# Altium PCB USB_Oscilloscope.PcbDoc (part 1 of 2)
Units mm, origin at the board's own origin, x right, y up, seen from the top; angles counter-clockwise.
Board outline 100 x 70 mm, 4 copper layers (SIG+PWR, Int1 (GND), Int2 (GND), SIG+PWR2), stack 1.369 mm thick; 112 components, 74 nets, 396 pads, 75 vias.
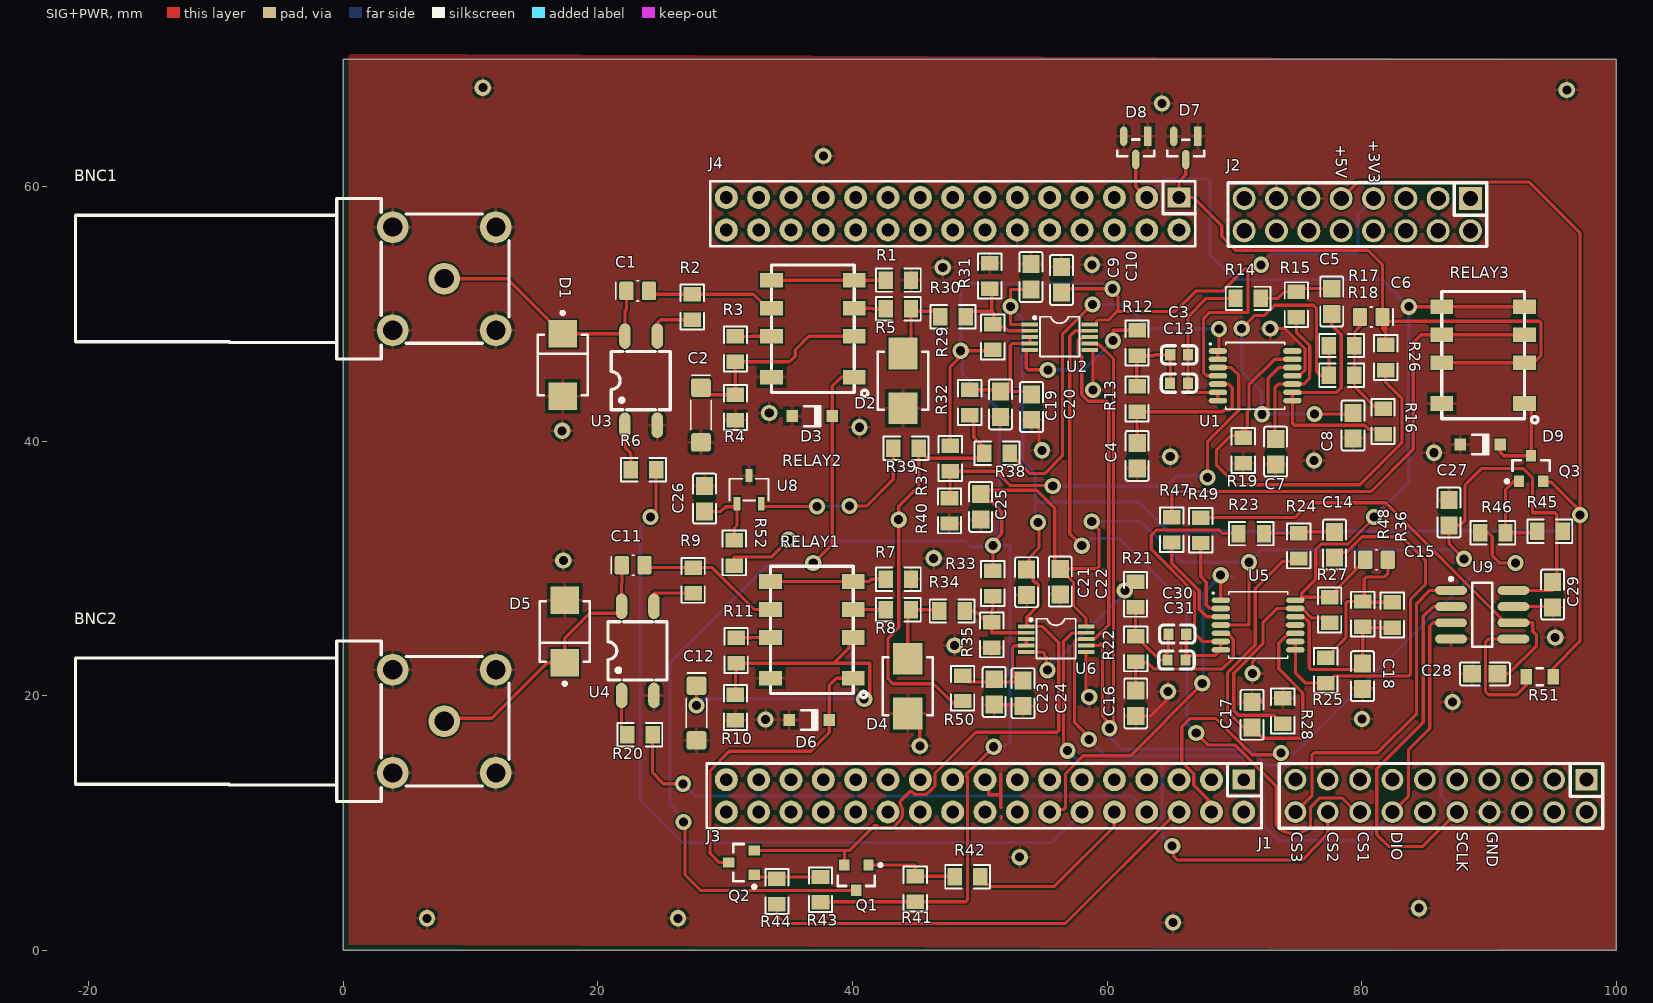
[diagram p0: SIG+PWR view]
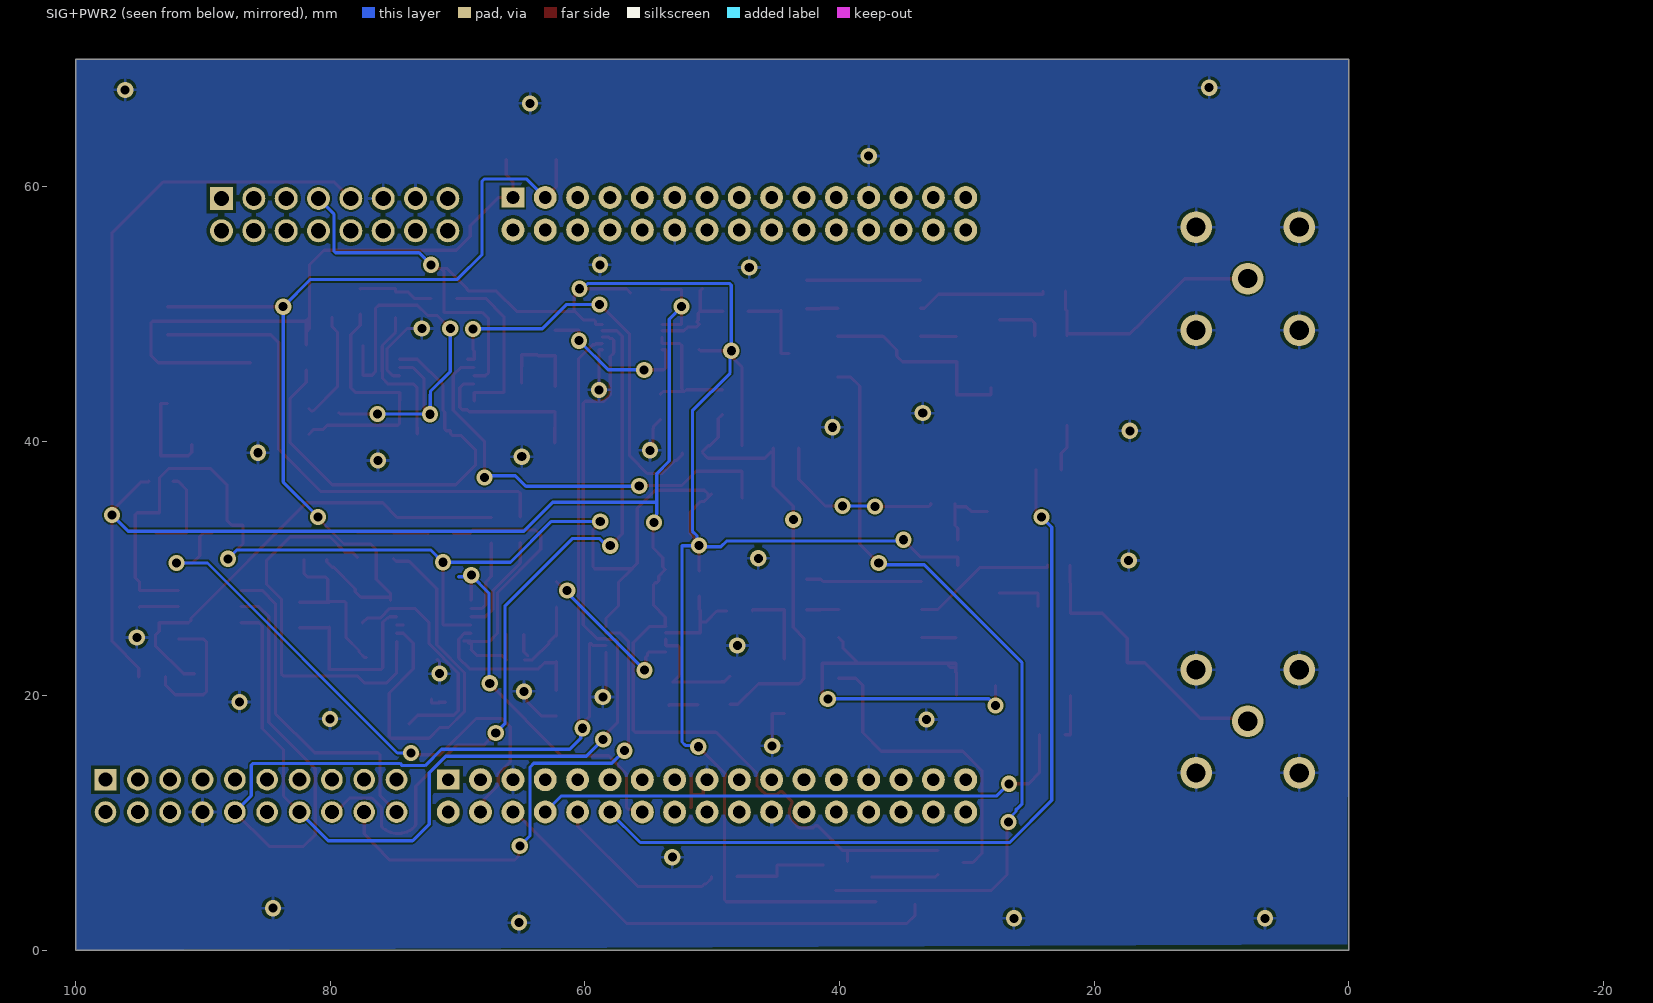
[diagram p1: SIG+PWR2 view, seen from below]
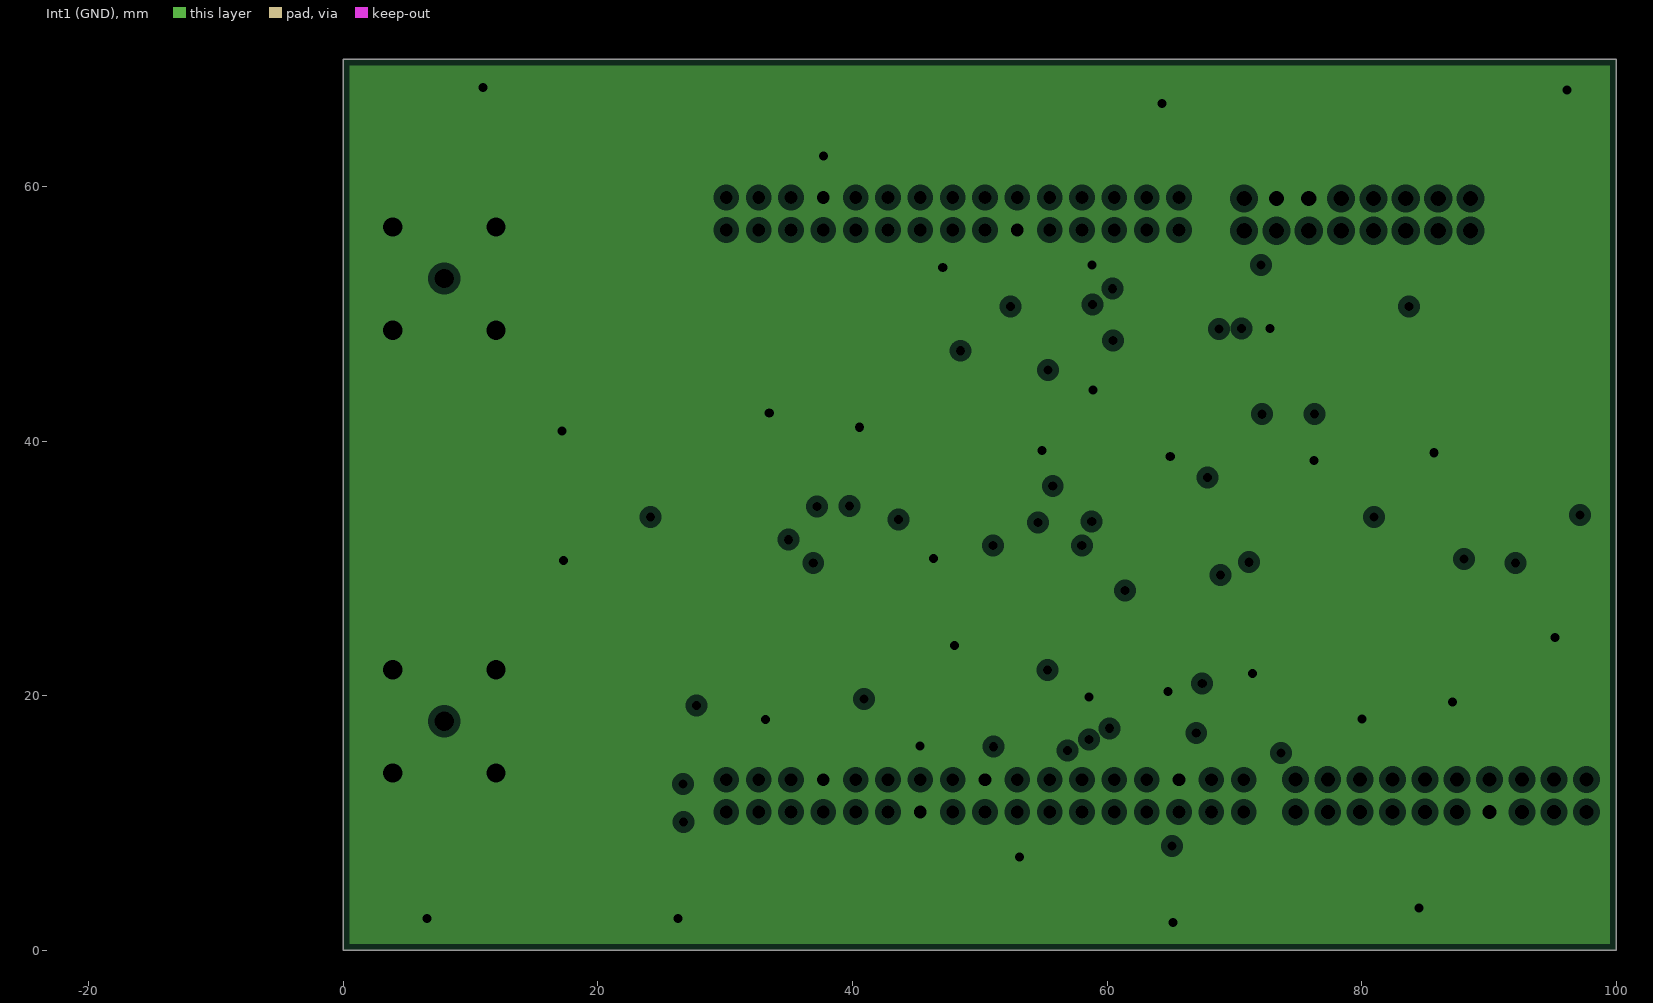
[diagram p2: Int1 (GND), clearances drawn from the general rule]
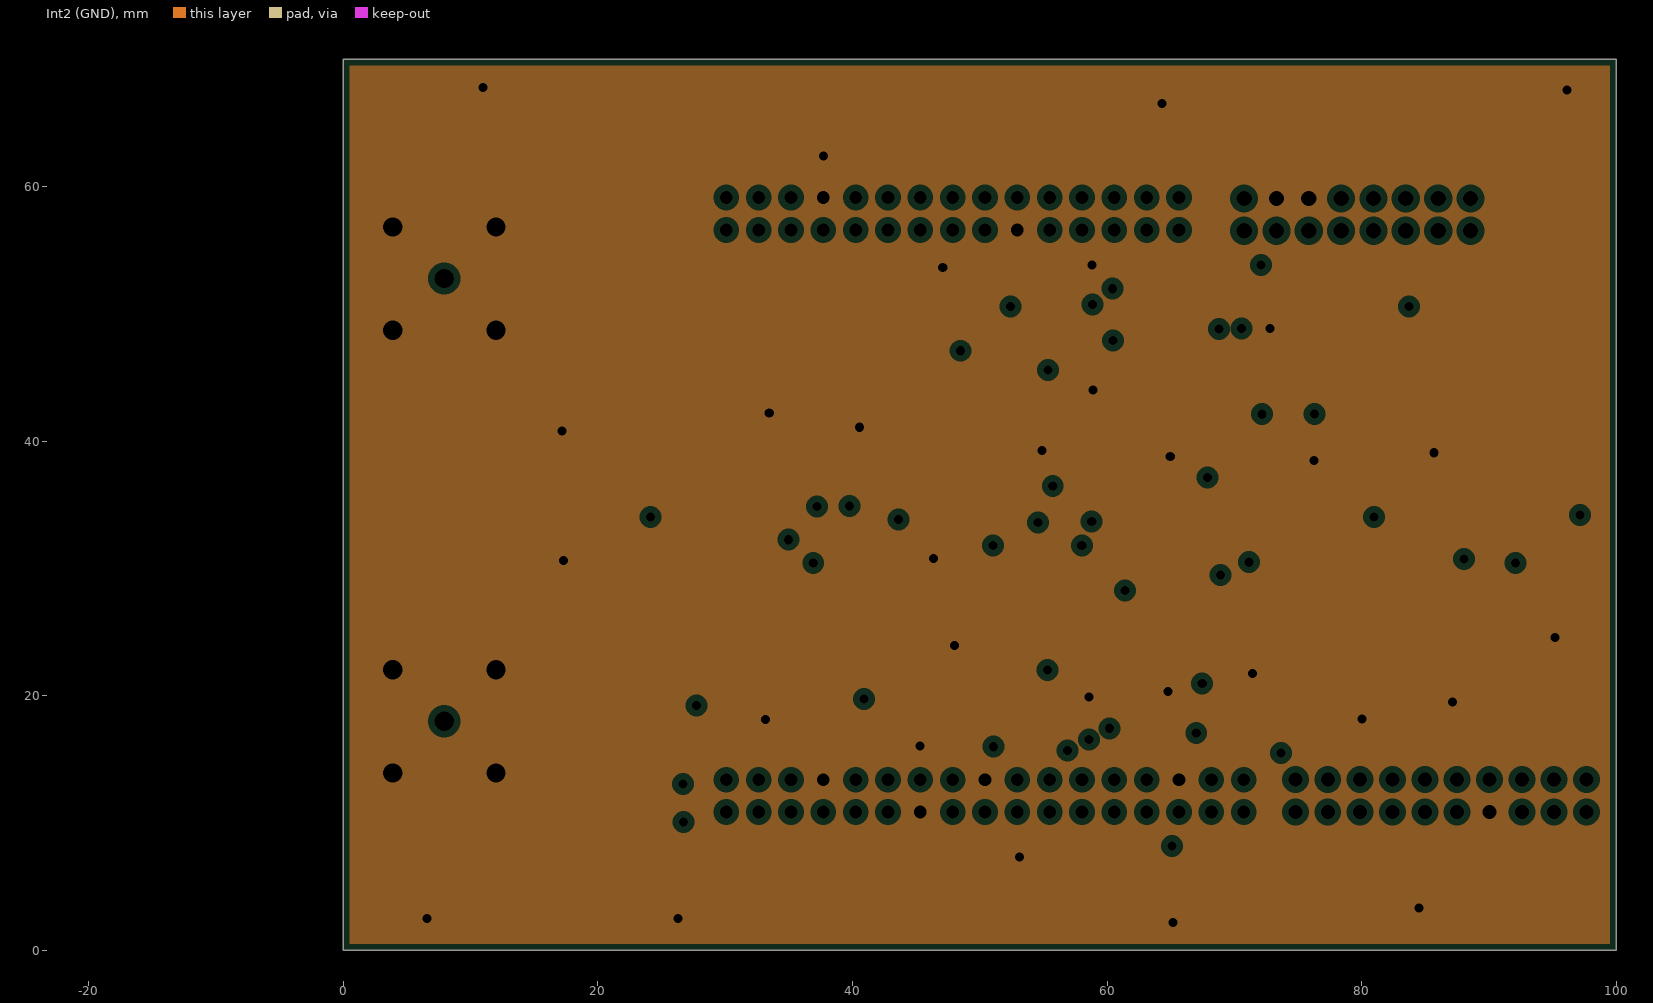
[diagram p3: Int2 (GND), clearances drawn from the general rule]

## Layer stack, top to bottom
Top Solder: solder mask 0.0254, SM-001, Dk 4
SIG+PWR: signal copper 0.035
Dielectric 1: prepreg 0.1295, PP-017, Dk 4.3
Dielectric 2: prepreg 0.1295, PP-017, Dk 4.3
Int1 (GND): plane copper 0.035, net GND
Dielectric 3: core 0.7112, Core-039, Dk 4.8
Int2 (GND): plane copper 0.035, net GND
Dielectric 4: prepreg 0.1295, PP-017, Dk 4.3
Dielectric 5: prepreg 0.1295, PP-017, Dk 4.3
SIG+PWR2: signal copper 0.035
Bottom Solder: solder mask 0.0254, SM-001, Dk 4

## Board outline
0,0 100,0 100,70 0,70

## Design rules (kind name [scope] priority, off if disabled: settings)
AssemblyTestPointUsage [All] p1: isadvanced=TRUE
AssemblyTestpoint [All] p1: isadvanced=TRUE testpointundercomponent=TRUE minsize=1.016 maxsize=2.54 preferedsize=1.524 minholesize=0 maxholesize=1.016 preferedholesize=0.813 testpointgrid=0.025 usegrid=TRUE gridtolerance=0 allowsidetop=TRUE allowsidebottom=TRUE
Clearance Clearance_1 [InNetClass('POWER') And OnMid vs OnMid] p1: gap=0.125 ignorepadtopadclearanceinfootprint=FALSE sourcerule=55 cellrowname=POWER cellrowtype=2 cellcolname=All cellcoltype=0 innerlayers=TRUE
Clearance Clearance_2 [InNetClass('POWER') And (ExistsOnLayer('SIG+PWR') Or ExistsOnLayer('SIG+PWR2')) vs (ExistsOnLayer('SIG+PWR') Or ExistsOnLayer('SIG+PWR2'))] p2: gap=0.125 ignorepadtopadclearanceinfootprint=FALSE sourcerule=55 cellrowname=POWER cellrowtype=2 cellcolname=All cellcoltype=0 outerlayers=TRUE
Clearance Clearance_3 [InNetClass('POWER')] p3: gap=0.254 ignorepadtopadclearanceinfootprint=FALSE sourcerule=55 cellrowname=POWER cellrowtype=2 cellcolname=All cellcoltype=0
Clearance Clearance_1 [InNetClass('SIGNAL') And OnMid vs OnMid] p4: gap=0.125 ignorepadtopadclearanceinfootprint=FALSE sourcerule=55 cellrowname=SIGNAL cellrowtype=2 cellcolname=All cellcoltype=0 innerlayers=TRUE
Clearance Clearance_2 [InNetClass('SIGNAL') And (ExistsOnLayer('SIG+PWR') Or ExistsOnLayer('SIG+PWR2')) vs (ExistsOnLayer('SIG+PWR') Or ExistsOnLayer('SIG+PWR2'))] p5: gap=0.125 ignorepadtopadclearanceinfootprint=FALSE sourcerule=55 cellrowname=SIGNAL cellrowtype=2 cellcolname=All cellcoltype=0 outerlayers=TRUE
Clearance Clearance_3 [InNetClass('SIGNAL')] p6: gap=0.254 ignorepadtopadclearanceinfootprint=FALSE sourcerule=55 cellrowname=SIGNAL cellrowtype=2 cellcolname=All cellcoltype=0
Clearance Clearance_1 [InNetClass('SPI') And OnMid vs OnMid] p7: gap=0.125 ignorepadtopadclearanceinfootprint=FALSE sourcerule=55 cellrowname=SPI cellrowtype=2 cellcolname=All cellcoltype=0 innerlayers=TRUE
Clearance Clearance_2 [InNetClass('SPI') And (ExistsOnLayer('SIG+PWR') Or ExistsOnLayer('SIG+PWR2')) vs (ExistsOnLayer('SIG+PWR') Or ExistsOnLayer('SIG+PWR2'))] p8: gap=0.125 ignorepadtopadclearanceinfootprint=FALSE sourcerule=55 cellrowname=SPI cellrowtype=2 cellcolname=All cellcoltype=0 outerlayers=TRUE
Clearance Clearance_3 [InNetClass('SPI')] p9: gap=0.254 ignorepadtopadclearanceinfootprint=FALSE sourcerule=55 cellrowname=SPI cellrowtype=2 cellcolname=All cellcoltype=0
Clearance Clearance_1 [OnMid vs OnMid] p10: gap=0.125 ignorepadtopadclearanceinfootprint=FALSE sourcerule=55 cellrowname="All xNets" cellrowtype=6 cellcolname=All cellcoltype=0 innerlayers=TRUE
Clearance Clearance_2 [(ExistsOnLayer('SIG+PWR') Or ExistsOnLayer('SIG+PWR2')) vs (ExistsOnLayer('SIG+PWR') Or ExistsOnLayer('SIG+PWR2'))] p11: gap=0.125 ignorepadtopadclearanceinfootprint=FALSE sourcerule=55 cellrowname="All xNets" cellrowtype=6 cellcolname=All cellcoltype=0 outerlayers=TRUE
Clearance Clearance_3 [] p12: gap=0.254 ignorepadtopadclearanceinfootprint=FALSE sourcerule=55 cellrowname="All xNets" cellrowtype=6 cellcolname=All cellcoltype=0
Clearance Clearance_1 [OnMid vs OnMid] p13: gap=0.254 ignorepadtopadclearanceinfootprint=FALSE except(0.125: Arc-Arc Arc-Track Arc-SMDPad Arc-Text Track-Track Track-SMDPad Track-Text SMDPad-Text Text-Text) sourcerule=55 cellrowname=All cellrowtype=0 cellcolname=All cellcoltype=0 innerlayers=TRUE
Clearance Clearance_2 [(ExistsOnLayer('SIG+PWR') Or ExistsOnLayer('SIG+PWR2')) vs (ExistsOnLayer('SIG+PWR') Or ExistsOnLayer('SIG+PWR2'))] p14: gap=0.254 ignorepadtopadclearanceinfootprint=FALSE except(0.125: Arc-Arc Arc-Track Arc-SMDPad Arc-Text Track-Track Track-SMDPad Track-Text SMDPad-Text Text-Text) sourcerule=55 cellrowname=All cellrowtype=0 cellcolname=All cellcoltype=0 outerlayers=TRUE
Clearance [All] p15: gap=0.254 ignorepadtopadclearanceinfootprint=FALSE ismatrix=TRUE miname0=SIGNAL mitype0=2 miname1=SPI mitype1=2 miname2=POWER mitype2=2 miname3="All xNets" mitype3=6
ComponentClearance [All] p1: isadvanced=TRUE gap=0.254 collisioncheckmode=3 verticalgap=0.254 showdistances=FALSE
FabricationTestPointUsage [All] p1: isadvanced=TRUE valid=0 allowmultiple=FALSE
FabricationTestpoint [All] p1: isadvanced=TRUE side=3 testpointundercomponent=TRUE minsize=1.016 maxsize=2.54 preferedsize=1.524 minholesize=0 maxholesize=1.016 preferedholesize=0.813 testpointgrid=0.025 allowsidetop=TRUE allowsidebottom=TRUE usegrid=TRUE gridtolerance=0
FanoutControl Fanout_BGA [IsBGA] p1: isadvanced=TRUE bgadir=Out bgaviamode=Centered fanoutstyle=Auto fanoutdirection=Alternating viagrid=0.025 // Fanout_BGA (Default Rule)
FanoutControl Fanout_LCC [IsLCC] p2: isadvanced=TRUE bgadir=Out bgaviamode=Centered fanoutstyle=Auto fanoutdirection=Alternating viagrid=0.025 // Fanout_LCC (Default Rule)
FanoutControl Fanout_SOIC [IsSOIC] p3: isadvanced=TRUE bgadir=Out bgaviamode=Centered fanoutstyle=Auto fanoutdirection=Alternating viagrid=0.025 // Fanout_SOIC (Default Rule)
FanoutControl Fanout_Small [(CompPinCount < 5)] p4: isadvanced=TRUE bgadir=Out bgaviamode=Centered fanoutstyle=Auto fanoutdirection=OutThenIn viagrid=0.025 // Fanout_Small (Default Rule)
FanoutControl Fanout_Default [All] p5: isadvanced=TRUE bgadir=Out bgaviamode=Centered fanoutstyle=Auto fanoutdirection=Alternating viagrid=0.025 // Fanout_Default (Default Rule)
Height [All] p1: isadvanced=TRUE minheight=0 maxheight=25.4 prefheight=12.7
HoleSize [All] p1: isadvanced=TRUE absolutevalues=TRUE maxlimit=2.54 minlimit=0.025 maxpercent=80.000 minpercent=20.000
HoleToHoleClearance [All] p1: isadvanced=TRUE gap=0.254 allowstackedmicrovias=TRUE
LayerPairs [All] p1: isadvanced=TRUE enforce=TRUE
MinimumSolderMaskSliver [All] p1: isadvanced=TRUE minsoldermaskwidth=0.254
NetAntennae [All] p1: isadvanced=TRUE netantennaetolerance=0
PasteMaskExpansion [All] p1: isadvanced=TRUE expansion=0
PlaneClearance [All] p1: isadvanced=TRUE clearance=0.508
PlaneConnect [All] p1: isadvanced=TRUE planeconnectstyle=Relief reliefexpansion=0.508 reliefentries=4 reliefconductorwidth=0.254 reliefairgap=0.254
PolygonConnect [All] p1: connectstyle=Relief reliefconductorwidth=0.254 reliefentries=4 polygonreliefangle="90 Angle" airgapwidth=0.254
RoutingCorners [All] p1: isadvanced=TRUE cornerstyle=45-Degree minsetback=2.54 maxsetback=2.54
RoutingLayers RoutingLayers_1 [InNet('DIO')] p1: top layer_v5=TRUE bottom layer_v5=TRUE
RoutingLayers RoutingLayers_2 [InNet('SCLK')] p2: top layer_v5=TRUE bottom layer_v5=TRUE
RoutingLayers RoutingLayers_3 [InNet('+3V3')] p3: top layer_v5=TRUE bottom layer_v5=TRUE
RoutingLayers RoutingLayers_4 [InNet('+5V')] p4: top layer_v5=TRUE bottom layer_v5=TRUE
RoutingLayers [All] p5: top layer_v5=TRUE bottom layer_v5=TRUE
RoutingPriority [All] p1: isadvanced=TRUE routingpriority=0
RoutingVias [All] p1: holewidth=0.711 width=1.27 viastyle="Through Hole" minholewidth=0.711 minwidth=1.27 maxholewidth=0.711 maxwidth=1.27
ShortCircuit [All] p1: isadvanced=TRUE allowed=FALSE
SilkToSilkClearance [All] p1: isadvanced=TRUE silktosilkclearance=0.254
SilkToSolderMaskClearance [IsPad] p1: isadvanced=TRUE minsilkscreentomaskgap=0.254 clearancetoexposedcopper=TRUE
SolderMaskExpansion [All] p1: isadvanced=TRUE expansion=0 istentingtop=FALSE
SupplyNets "Schematic Supply Nets" [InNet('GND')] p1: isadvanced=TRUE voltage=0.000
UnRoutedNet [All] p1: isadvanced=TRUE
UnpouredPolygon [All] p1: isadvanced=TRUE
Width MaxMinWidth_1 [InNet('+3V3')] p1: maxlimit=0.508 minlimit=0.254 preferedwidth=0.508 minimp=50.000000 maximp=50.000000 favimp=50.000000
Width MaxMinWidth_2 [InNet('+5V')] p2: maxlimit=0.508 minlimit=0.254 preferedwidth=0.508 minimp=50.000000 maximp=50.000000 favimp=50.000000
Width [All] p3: maxlimit=0.254 minlimit=0.254 preferedwidth=0.254
3 further rules are at their usual default settings.

## Classes and differential pairs
net class SPI: CS1_ CS2_ CS3_ DIO SCLK
net class SIGNAL: ATTEN_SEL_CH1 ATTEN_SEL_CH2 NetBNC1_1 NetBNC2_1 NetC1_2 NetC2_1 NetC3_1 NetC3_2 NetC4_2 NetC5_1 NetC5_2 NetC6_2 NetC7_2 NetC8_1 NetC11_2 NetC12_1 NetC14_1 NetC14_2 NetC15_2 NetC16_2 NetC17_2 NetC18_1 NetC19_1 NetC26_2 NetC28_1 NetC30_1 NetC30_2 NetQ1_1 NetQ2_1 NetQ3_1 NetR1_2 NetR2_1 NetR3_2 NetR5_2 NetR6_2 NetR7_2 NetR8_2 NetR9_1 NetR11_2 NetR19_2 NetR20_2 NetR27_2 NetR29_2 NetR33_2 NetR37_2 NetR38_2 NetR39_2 NetR47_1 NetR47_2 NetR49_2 NetR51_1 SIGNAL_ATTEN_SEL_CH1 SIGNAL_ATTEN_SEL_CH2 SIGNAL_CH1_CLAMPED SIGNAL_CH2_CLAMPED SIGNAL_COUPLING_CH1 SIGNAL_COUPLING_CH2 SIGNAL_LPF_CH1_IN SIGNAL_LPF_CH1_OUT SIGNAL_LPF_CH2_IN SIGNAL_LPF_CH2_OUT SIGNAL_TRIG_INPUT SIGNAL_TRIG_SEL TRIG_SEL VREF_1.65
net class POWER: +1V625 +3V3 +5V
component class Trigger: C27 C28 C29 D9 Q3 R45 R46 R47 R49 R51 RELAY3 U5 U9
component class REF_VOLTAGE_RELAY_DRIVER: C25 C26 Q1 Q2 R37 R38 R39 R40 R41 R42 R43 R44 R52 U1 U8
component class PGA: C9 C10 C19 C20 C21 C22 C23 C24 R29 R30 R31 R32 R33 R34 R35 R50 U2 U6
component class LPF: C3 C5 C6 C7 C8 C13 C14 C15 C16 C30 C31 R12 R13 R14 R15 R16 R17 R18 R19 R21 R22 R23 R24 R25 R26 R27 R36 R48
component class H723ZG_Interface: D7 D8 J2 J3 J4
component class Analog_Input: BNC1 BNC2 C1 C2 C11 C12 D1 D2 D3 D4 D5 D6 R1 R2 R3 R4 R5 R6 R7 R8 R9 R10 R11 R20 RELAY1 RELAY2 U3 U4

## Components (designator, comment, footprint, x,y, rotation, side; value= is the part's Value field where it differs from the comment)
BNC1 "BNC-KWE-6" CONN-TH_BNC-KWE-6 7.94,52.76 r270 top value=6GHz
BNC2 "BNC-KWE-6" CONN-TH_BNC-KWE-6 7.94,18 r270 top value=6GHz
C1 "TCC0805COG200J500BT" CAPCP2012X150N 23.132,51.8 r0 top value=20pF
C2 "JZ060HV" CAPCP4914X60N 28.1,42.05 r270 top
C3 "CL10C101JB8NNNC" C0603 65.659,46.78 r0 top value=100pF
C4 "VJ0805A100FXACW1BC" C0805 62.36,38.851 r90 top value=10pF
C5 "TCC0805X5R226K100FT" C0805 77.64,50.969 r270 top value=22pF
C6 "Capacitor" CAPCP2012X150N 80.743,49.75 r180 top value=20pF
C7 "VJ0805A100FXACW1BC" C0805 73.24,39.17 r90 top value=10pF
C8 "0805CG6R0C500NT_C67560" C0805 79.32,41.221 r270 top value=16pF
C9 "0805CG6R0C500NT_C67560" C0805 54.01,52.901 r270 top value=100nF
C10 "0805CG6R0C500NT_C67560" C0805 56.42,52.659 r90 top value=100nF
C11 "Capacitor" CAPCP2012X150N 22.777,30.26 r0 top value=20pF
C12 "JZ060HV" CAPCP4914X60N 27.75,18.65 r270 top
C13 "0603CG620J500NT" C0603 65.648,44.56 r0 top value=62pF
C14 "TCC0805X5R226K100FT" C0805 77.87,31.879 r270 top value=22pF
C15 "Capacitor" CAPCP2012X150N 81.162,30.68 r0 top value=20pF
C16 "VJ0805A100FXACW1BC" C0805 62.25,19.409 r90 top value=10pF
C17 "VJ0805A100FXACW1BC" C0805 71.39,18.51 r270 top value=10pF
C18 "0805CG6R0C500NT_C67560" C0805 80.06,21.539 r270 top value=16pF
C19 "TCC0805X5R226K100FT" C0805 51.63,42.89 r270 top value=22µF
C20 "0805CG6R0C500NT_C67560" C0805 54.07,42.68 r90 top value=100nF
C21 "0805CG6R0C500NT_C67560" C0805 53.68,28.919 r90 top value=100nF
C22 "0805CG6R0C500NT_C67560" C0805 56.32,28.969 r270 top value=100nF
C23 "TCC0805X5R226K100FT" C0805 51.13,20.3 r270 top value=22µF
C24 "0805CG6R0C500NT_C67560" C0805 53.4,20.2 r90 top value=100nF
C25 "0805CG6R0C500NT_C67560" C0805 50.07,34.841 r270 top value=100nF
C26 "0805CG6R0C500NT_C67560" C0805 28.39,35.479 r270 top value=100nF
C27 "0805CG6R0C500NT_C67560" C0805 86.85,34.391 r90 top value=100nF
C28 "0805CG6R0C500NT_C67560" C0805 89.669,21.73 r180 top value=100nF
C29 "0805CG6R0C500NT_C67560" C0805 94.99,27.951 r270 top value=100nF
C30 "CL10C101JB8NNNC" C0603 65.509,24.85 r0 top value=100pF
C31 "0603CG620J500NT" C0603 65.45,22.81 r0 top value=62pF
D1 "SMBJ40A" FP-SMBJ-MFG 17.24,45.97 r270 top
D2 "SMBJ5.0CA-13-F" FP-SMB-CA-MFG 43.97,44.74 r90 top
D3 "1N4148W-7-F" DIOD-SOD123-2_V 36.84,41.96 r0 top
D4 "SMBJ5.0CA-13-F" FP-SMB-CA-MFG 44.35,20.76 r90 top
D5 "SMBJ40A" FP-SMBJ-MFG 17.4,25.05 r90 top
D6 "1N4148W-7-F" DIOD-SOD123-2_V 36.61,18.1 r0 top
D7 "BAV99LT1G" FP-318-08-IPC_B 66.18,63.03 r270 top
D8 "BAV99LT1G" FP-318-08-IPC_B 62.25,63.04 r270 top
D9 "1N4148W-7-F" DIOD-SOD123-2_V 89.31,39.74 r0 top
J1 "2.54-2*10" HDR-TH_20P-P2.54-V-M-R2-C10-S2.54 86.22,12.14 r180 top locked
J2 "2.54-2*8P针_C68234" HDR-TH_16P-P2.54-V-M-R2-C8-S2.54 79.65,57.79 r180 top
J3 "2.54-2*17" HDR-TH_34P-P2.54-V-M-R2-C17-S2.54-2 52.95,12.14 r180 top locked
J4 "PZ2.54-2*15" HDR-TH_30P-P2.54-V-M-R2-C15-S2.54-2 47.87,57.86 r180 top
Q1 "2N7002LT1G" ONSC-SOT-23-3-318-08_V 40.3,5.71 r270 top
Q2 "2N7002LT1G" ONSC-SOT-23-3-318-08_V 31.29,6.9 r180 top
Q3 "2N7002LT1G" ONSC-SOT-23-3-318-08_V 93.3,37.85 r90 top
R1 "RT0805BRD0710K1L" R0805 43.601,52.65 r180 top value=1M
R2 "RT0805BRD0710K1L" R0805 27.41,50.528 r90 top value=100
R3 "RT0805BRD0710K1L" R0805 30.81,47.228 r90 top value=910k
R4 "0805W8F0000T5E_C17477" R0805 30.81,42.639 r90 top value=100k
R5 "0805W8F0000T5E_C17477" R0805 43.601,50.4 r180 top value=1k
R6 "RT0805BRD0710K1L" R0805 23.582,37.75 r180 top value=1.5k
R7 "RT0805BRD0710K1L" R0805 43.601,29.15 r180 top value=1M
R8 "0805W8F0000T5E_C17477" R0805 43.601,26.76 r180 top value=1k
R9 "RT0805BRD0710K1L" R0805 27.48,29.068 r90 top value=100
R10 "0805W8F0000T5E_C17477" R0805 30.81,19.07 r90 top value=100k
R11 "RT0805BRD0710K1L" R0805 30.86,23.55 r90 top value=910k
R12 "RT0805BRD0710K1L" R0805 62.35,47.71 r270 top value=3.57k
R13 "RT0805BRD0710K1L" R0805 62.35,43.301 r270 top value=6.98k
R14 "RT0805BRD0710K1L" R0805 71.082,51.21 r180 top value=10.1k
R15 "0805W8F0000T5E_C17477" R0805 74.87,50.721 r270 top value=18.7k
R16 "0805W8F0000T5E_C17477" R0805 81.67,41.55 r270 top value=7.68k
R17 "FRC0805F3402TS" R0805 78.422,47.51 r180 top value=34k
R18 "FRC0805F3402TS" R0805 78.422,45.18 r180 top value=34k
R19 "0805W8F0000T5E_C17477" R0805 70.69,39.259 r90 top value=10k
R20 "RT0805BRD0710K1L" R0805 23.301,16.95 r180 top value=1.5k
R21 "RT0805BRD0710K1L" R0805 62.23,27.968 r90 top value=3.57k
R22 "RT0805BRD0710K1L" R0805 62.25,23.691 r270 top value=6.98k
R23 "RT0805BRD0710K1L" R0805 71.319,32.74 r0 top value=10.1k
R24 "0805W8F0000T5E_C17477" R0805 75.04,31.782 r270 top value=18.7k
R25 "0805W8F0000T5E_C17477" R0805 77.18,22 r270 top value=7.68k
R26 "RT0805BRD0710K1L" R0805 81.88,46.558 r90 top value=3.01k
R27 "RT0805BRD0710K1L" R0805 77.47,26.74 r270 top value=3.01k
R28 "0805W8F0000T5E_C17477" R0805 73.8,18.81 r270 top value=10k
R29 "RT0805BRD0710K1L" R0805 51.01,48.188 r90 top value=5.76k
R30 "0805W8F0000T5E_C17477" R0805 47.892,49.76 r180 top value=10k
R31 "0805W8F0000T5E_C17477" R0805 50.79,52.968 r90 top value=20k
R32 "RT0805BRD0710K1L" R0805 49.21,43.028 r90 top value=100
R33 "RT0805BRD0710K1L" R0805 51.02,28.831 r270 top value=5.76k
R34 "0805W8F0000T5E_C17477" R0805 47.831,26.66 r180 top value=10k
R35 "0805W8F0000T5E_C17477" R0805 50.94,24.791 r270 top value=20k
R36 "FRC0805F3402TS" R0805 82.39,26.35 r270 top value=34k
R37 "0805W8F0000T5E_C17477" R0805 47.67,38.631 r270 top value=10k
R38 "0805W8F0000T5E_C17477" R0805 51.35,39.05 r0 top value=0
R39 "0805W8F0000T5E_C17477" R0805 44.211,39.44 r180 top value=0
R40 "0805W8F0000T5E_C17477" R0805 47.62,34.531 r270 top value=10k
R41 "0805W8F0000T5E_C17477" R0805 44.92,4.83 r270 top value=10k
R42 "0805W8F0000T5E_C17477" R0805 49.05,5.78 r180 top value=1k
R43 "0805W8F0000T5E_C17477" R0805 37.49,4.77 r270 top value=10k
R44 "0805W8F0000T5E_C17477" R0805 34.07,4.638 r90 top value=1k
R45 "0805W8F0000T5E_C17477" R0805 94.768,32.92 r0 top value=10k
R46 "0805W8F0000T5E_C17477" R0805 90.289,32.81 r0 top value=1k
R47 "0805W8F0000T5E_C17477" R0805 65.08,33.04 r270 top value=1k
R48 "FRC0805F3402TS" R0805 80.08,26.411 r270 top value=34k
R49 "0805W8F0000T5E_C17477" R0805 67.35,33.001 r270 top value=1k
R50 "RT0805BRD0710K1L" R0805 48.65,20.59 r90 top value=100
R51 "5.1K" FP-RT0805-MFG 93.98,21.49 r0 top value=5.1kΩ
R52 "0805W8F0000T5E_C17477" R0805 30.72,31.231 r270 top value=0
RELAY1 "HFD4/5-SR" RELAY-SMD_HFD4-5-SR 36.81,25.18 r90 top
RELAY2 "HFD4/5-SR" RELAY-SMD_HFD4-5-SR 36.89,48.83 r90 top
RELAY3 "HFD4/5-SR" RELAY-SMD_HFD4-5-SR 89.53,46.76 r90 top
U1 "TPH2504-TR" TSOP65P640X120-14N 71.63,45.13 r0 top
U2 "PGA113AIDGSR" VSSOP-10_L3.0-W3.0-P0.50-LS4.9-BL 56.29,48.17 r270 top
U3 "AQY282SX" SOP-4_L4.3-W4.4-P2.54-LS7.0-BL 23.4,44.75 r0 top
U4 "AQY282SX" SOP-4_L4.3-W4.4-P2.54-LS7.0-BL 23.14,23.53 r0 top
U5 "TPH2504-TR" TSOP65P640X120-14N 71.86,25.56 r0 top
U6 "PGA113AIDGSR" VSSOP-10_L3.0-W3.0-P0.50-LS4.9-BL 56,24.45 r270 top
U8 "REF3016EAIDBZR" SOT-23-3_L3.0-W1.7-P0.95-LS2.9-BR 31.88,36.19 r270 top
U9 "MCP41010T-I/SN" SOIC-SN8_M 89.46,26.37 r0 top locked

## Footprints (in the part's own frame and the unit in brackets; to place one, negate y for a bottom-side part, rotate by r counter-clockwise, add the part's x,y. Pads: shape width x height; smd on the part's side, far side on the other; paste and mask are expansions set on the pad)
C0603 [mil]
  rect 31.5x35.4 smd: 1(-27.5,0) 2(27.6,0)
  silkscreen extent -55,-28 55,28
C0805 [mil]
  rect 55.5x53.1 smd paste-3937 mask+2: 1(-39.4,0) 2(39.4,0)
  silkscreen extent -77,-35 77,36
CAPCP2012X150N [mm] "Chip Capacitor, 2-Leads, Body 2.00x1.25mm, IPC Medium Density"
  rrect25% 1.125x1.45 smd: 1(-0.887,0) 2(0.888,0)
  silkscreen extent -1.71,-0.79 0.06,0.79, body extent -1,-0.63 1,0.63, height 1.5
CAPCP4914X60N [mm] "Chip Capacitor, 2-Leads, Body 4.90x1.45mm, IPC Medium Density"
  rrect25% 1.45x1.55 smd: 1(-2.15,0) 2(2.15,0)
  silkscreen extent -3.14,-0.81 1.16,0.81, body extent -2.45,-0.72 2.45,0.72, height 0.6
CONN-TH_BNC-KWE-6 [mil]
  round 98.4 hole 59.1: 1(0,0) 2(-159.4,159.4) 3(-159.4,-159.4) 4(159.5,-159.4) 5(159.5,159.4)
  silkscreen extent -248,-1140 248,200
DIOD-SOD123-2_V [mm] "SOD123, 2-Leads, Body 2.7x1.55mm, Height 1.45mm"
  rect 0.9x0.95 smd: 1(-1.575,0) 2(1.575,0)
  silkscreen extent -0.63,-0.82 0.64,0.77, body extent -1.35,-0.77 1.35,0.77, height 1.45
FP-318-08-IPC_B [mm]
  rect 1.524x0.578 smd paste+0 mask+0: 1(-0.91,0.95)
  rrect100% 1.524x0.578 smd paste+0 mask+0: 2(-0.91,-0.95) 3(0.91,0)
  silkscreen extent -0.65,-1.45 0.65,1.45, body extent -1.92,-1.7 1.92,1.7, height 0.25
FP-RT0805-MFG [mm]
  rect 0.9x1.2 smd paste+0 mask+0: 1(-1.05,0) 2(1.05,0)
  silkscreen extent -0.22,-0.68 0.22,0.68, body extent -1.6,-0.77 1.6,0.77, height 0.25
FP-SMB-CA-MFG [mm]
  rect 2.5x2.3 smd paste+0 mask+0: 1(-2.15,0) 2(2.15,0)
  silkscreen extent -2.29,-1.97 2.29,1.97, body extent -3.5,-2.07 3.5,2.07, height 0.25
FP-SMBJ-MFG [mm]
  rect 2.16x2.26 smd paste+0 mask+0: 1(-2.45,0) 2(2.45,0)
  silkscreen extent -4.22,-1.97 2.38,1.97, body extent -3.63,-2.07 3.63,2.07, height 0.25
HDR-TH_16P-P2.54-V-M-R2-C8-S2.54 [mil]
  rect 70.9x70.9 hole 47.2: 1(-350,-50)
  round 70.9 hole 47.2: 2(-350,50) 3(-250,-50) 4(-250,50) 5(-150,-50) 6(-150,50) 7(-50,-50) 8(-50,50) 9(50,-50) 10(50,50) 11(150,-50) 12(150,50) 13(250,-50) 14(250,50) 15(350,-50) 16(350,50)
  silkscreen extent -400,-98 400,98
HDR-TH_20P-P2.54-V-M-R2-C10-S2.54 [mil]
  rect 66.9x66.9 hole 43.3: 1(-450,-50)
  round 66.9 hole 43.3: 2(-450,50) 3(-350,-50) 4(-350,50) 5(-250,-50) 6(-250,50) 7(-150,-50) 8(-150,50) 9(-50,-50) 10(-50,50) 11(50,-50) 12(50,50) 13(150,-50) 14(150,50) 15(250,-50) 16(250,50) 17(350,-50) 18(350,50) 19(450,-50) 20(450,50)
  silkscreen extent -500,-100 500,100
HDR-TH_30P-P2.54-V-M-R2-C15-S2.54-2 [mil]
  rect 70.9x62 hole 39.4: 1(-700,-50)
  round 70.9 hole 39.4: 2(-700,50) 3(-600,-50) 4(-600,50) 5(-500,-50) 6(-500,50) 7(-400,-50) 8(-400,50) 9(-300,-50) 10(-300,50) 11(-200,-50) 12(-200,50) 13(-100,-50) 14(-100,50) 15(0,-50) 16(0,50) 17(100,-50) 18(100,50) 19(200,-50) 20(200,50) 21(300,-50) 22(300,50) 23(400,-50) 24(400,50) 25(500,-50) 26(500,50) 27(600,-50) 28(600,50) 29(700,-50) 30(700,50)
  silkscreen extent -750,-100 750,100
HDR-TH_34P-P2.54-V-M-R2-C17-S2.54-2 [mil]
  rect 70.9x62 hole 39.4: 1(-700,-50)
  round 70.9 hole 39.4: 2(-700,50) 3(-600,-50) 4(-600,50) 5(-500,-50) 6(-500,50) 7(-400,-50) 8(-400,50) 9(-300,-50) 10(-300,50) 11(-200,-50) 12(-200,50) 13(-100,-50) 14(-100,50) 15(0,-50) 16(0,50) 17(100,-50) 18(100,50) 19(200,-50) 20(200,50) 21(300,-50) 22(300,50) 23(400,-50) 24(400,50) 25(500,-50) 26(500,50) 27(600,-50) 28(600,50) 29(700,-50) 30(700,50) 31(800,-50) 32(800,50) 33(900,-50) 34(900,50)
  silkscreen extent -755,-100 960,100
ONSC-SOT-23-3-318-08_V [mm] "SOT23, 3-Leads, Body 2.92x1.3mm, Pitch 0.95mm"
  rect 0.9x0.8 smd: 1(-1,0.95) 2(-1,-0.95) 3(1,0)
  silkscreen extent -1.12,-1.46 0.65,2.03, body extent -0.65,-1.46 0.65,1.46, height 1.11
R0805 [mm]
  rect 1.133x1.377 smd paste-100 mask+0.051: 1(-0.998,0) 2(1.001,0)
  silkscreen extent -1.76,-0.92 1.76,0.92
RELAY-SMD_HFD4-5-SR [mil]
  rect 45.3x70.9 smd: 1(-149.6,-127.9) 2(-23.6,-127.9) 3(63,-127.9) 4(149.6,-127.9) 5(149.6,127.9) 6(63,127.9) 7(-23.6,127.9) 8(-149.6,127.9)
  silkscreen extent -210,-170 197,128
SOIC-SN8_M [mm] "SOIC, 8-Leads, Body 4.9x3.9mm, Pitch 1.27mm, IPC Low Density"
  oval 2.5x0.7 smd: 1(-2.45,1.905) 2(-2.45,0.635) 3(-2.45,-0.635) 4(-2.45,-1.905) 5(2.45,-1.905) 6(2.45,-0.635) 7(2.45,0.635) 8(2.45,1.905)
  silkscreen extent -2.57,-2.5 0.8,2.93, body extent -2,-2.5 2,2.5, height 1.75
SOP-4_L4.3-W4.4-P2.54-LS7.0-BL [mm]
  oval 0.899x1.999 smd: 1(-1.27,-3.5) 2(1.27,-3.5) 3(1.27,3.5) 4(-1.27,3.5)
  silkscreen extent -2.35,-2.29 2.29,2.29
SOT-23-3_L3.0-W1.7-P0.95-LS2.9-BR [mm]
  rect 1.036x0.531 smd: 1(1.1,-0.95) 2(1.1,0.95) 3(-1.102,0)
  silkscreen extent -0.86,-1.53 0.86,1.53
TSOP65P640X120-14N [mm] "TSOP, 14-Leads, Body 5.00x4.40mm, Pitch 0.65mm, IPC Medium Density"
  oval 1.45x0.45 smd: 1(-2.925,1.95) 2(-2.925,1.3) 3(-2.925,0.65) 4(-2.925,0) 5(-2.925,-0.65) 6(-2.925,-1.3) 7(-2.925,-1.95) 8(2.925,-1.95) 9(2.925,-1.3) 10(2.925,-0.65) 11(2.925,0) 12(2.925,0.65) 13(2.925,1.3) 14(2.925,1.95)
  silkscreen extent -3.59,-2.61 2.31,2.61, body extent -2.2,-2.5 2.2,2.5, height 1.2
VSSOP-10_L3.0-W3.0-P0.50-LS4.9-BL [mil]
  rect 11.8x51.2 smd paste+0 mask+2: 1(-39.3,-92.5) 2(-19.6,-92.5) 3(0,-92.5) 4(19.7,-92.5) 5(39.4,-92.5) 6(39.4,92.5) 7(19.7,92.5) 8(0,92.5) 9(-19.6,92.5) 10(-39.3,92.5)
  silkscreen extent -64,-82 60,61

## Part data
BNC1 BNC2: library part CMP-004-000000-4, "Connector Type:Board Side Interface:Inner Bore Number of Ports:1 Interface Length/Height:12mm Frequency:6GHz RF Series:BNC Impedance:50Ω Style:Bent tip", JLCPCB Part Class="Extended Part", LCSC Part Name="内孔 BNC 弯头", Manufacturer=cntitle(中戈泰斗), Supplier Part Number=C20415789, 3D Model=1ee7285c1b8f4c589de2df097266f005聨0819f05c4eef4c71ace90d822a990e87, 3D Model Transform=531.016,1338.97378,0,0,0,0,0,-470.511,-149.606, AddInBom=yes, Connector Type="Board Side", ConvertToPcb=yes, Datasheet=https://item.szlcsc.com/datasheet/BNC-KWE-6/21743971.html, Design Item ID=BNC-KWE-6, Device=BNC-KWE-6, FootprintName=CONN-TH_BNC-KWE-6, Impedance=50Ω, Interface="Inner Bore", Interface Length/Height=12mm, Manufacturer Part Number=BNC-KWE-6, ModelName=CONN-TH_BNC-KWE-6, Number of Ports=1, RF Series=BNC, Source=P1.SCHLIB, Style="Bent tip", Supplier Footprint=弯插, Symbol=BNC-KWE-6
C1: library part CMP-00003-4, "Mlcc 20PF ±5% C0G(NP0) 50V 0805", Manufacturer=CCTC, Supplier Part Number=C5375851, Manufacturer Part Number=TCC0805COG200J500BT, Supplier=JLCPCB
C2 C12: library part CMP-00011-9, "Variable Capacitor, 350V, 2pF Min, 6pF Max, Vertical Adjuster, Surface Mount", Case/Package=1813, Max Operating Temperature=85°C, Min Operating Temperature=-40°C, Voltage Rating (DC)=125V, Height=1.45mm, Length=4.5mm, Lifecycle Status=Production, Mounting Technology="Surface Mount", REACH SVHC=Yes, RoHS=Compliant, Width=3.2mm
C3 C30: library part CMP-015-000009-1, "Capacitance:100pF Tolerance:±5% Tolerance:±5% Voltage Rating:50V Temperature Coefficient:C0G", JLCPCB Part Class="Basic Part", LCSC Part Name="100pF ±5% 50V", Manufacturer=SAMSUNG(三星), Temperature Coefficient=C0G, Tolerance=5%, Voltage Rating=50V, AddInBom=yes, ConvertToPcb=yes, Datasheet=https://item.szlcsc.com/datasheet/CL10C101JB8NNNC/15530.html, Design Item ID=CL10C101JB8NNNC, Device=CL10C101JB8NNNC, FootprintName=C0603, ManufacturerPart=CL10C101JB8NNNC, ModelId=624118aa3cc7497086c383c2d72e0852ÂŽ0819f05c4eef4c71ace90d822a990e87, ModelName=C0603_L1.6-W0.8-H0.8, ModelTransform=62.992,31.496,0,0,0,0,0,0,0, Source=P1.SCHLIB, Supplier Footprint=0603, SupplierPart=C14858, Symbol=CL10C101JB8NNNC
C4 C7 C16 C17: library part CMP-015-000004-1, "Capacitance:10pF Tolerance:±1% Tolerance:±1% Voltage Rating:50V Temperature Coefficient:C0G", JLCPCB Part Class="Extended Part", LCSC Part Name="10pF ±1% 50V", Manufacturer=VISHAY(威世), Supplier Part Number=C2177610, Temperature Coefficient=C0G, Tolerance=1%, Voltage Rating=50V, AddInBom=yes, ConvertToPcb=yes, Datasheet=https://item.szlcsc.com/datasheet/VJ0805A100FXACW1BC/2269676.html, Design Item ID=VJ0805A100FXACW1BC, Device=VJ0805A100FXACW1BC, FootprintName=C0805, Manufacturer Part Number=VJ0805A100FXACW1BC, ModelId=8c88e81f49c6409b980720ec8953afb6聨0819f05c4eef4c71ace90d822a990e87, ModelName=C0805_L2.0-W1.3-H1.3, ModelTransform=78.74,51.181,0,0,0,0,0,0.0005,0, Source=P1.SCHLIB, Supplier Footprint=0805, Symbol=VJ0805A100FXACW1BC
C5 C14: library part CMP-015-000002-1, "Capacitance:22pF Tolerance:±1% Tolerance:±1% Voltage Rating:50V Temperature Coefficient:C0G", JLCPCB Part Class="Extended Part", LCSC Part Name="22pF ±1% 50V", Manufacturer=FH(风华), Manufacturer Part Number=0805CG220F500NT, Supplier Part Number=C190088, Temperature Coefficient=C0G, Tolerance=1%, Voltage Rating=50V, AddInBom=yes, ConvertToPcb=yes, Datasheet=https://item.szlcsc.com/datasheet/0805CG220F500NT/208470.html, Design Item ID=0805CG220F500NT, Device=0805CG220F500NT, FootprintName=C0805, ModelId=8c88e81f49c6409b980720ec8953afb6聨0819f05c4eef4c71ace90d822a990e87, ModelName=C0805_L2.0-W1.3-H1.3, ModelTransform=78.74,51.181,0,0,0,0,0,0.0005,0, Source=P1.SCHLIB, Supplier Footprint=0805, Symbol=0805CG220F500NT
C6 C11 C15: library part CMP-00003-4, "Mlcc 20PF ±5% C0G(NP0) 50V 0805", Manufacturer=CCTC, Manufacturer Part Number=TCC0805COG200J500BT, Supplier Part Number=C5375851, Supplier=JLCPCB
C8 C18: library part CMP-015-000001-1, "Capacitance:16pF Tolerance:±5% Tolerance:±5% Voltage Rating:50V Temperature Coefficient:C0G", JLCPCB Part Class="Extended Part", LCSC Part Name="16pF ±5% 50V", Manufacturer=FH(风华), Manufacturer Part Number=0805CG160J500NT, Supplier Part Number=C1796, Temperature Coefficient=C0G, Tolerance=5%, Voltage Rating=50V, AddInBom=yes, ConvertToPcb=yes, Datasheet=https://item.szlcsc.com/datasheet/0805CG160J500NT/2148.html, Design Item ID=0805CG160J500NT, Device=0805CG160J500NT, FootprintName=C0805, ModelId=8c88e81f49c6409b980720ec8953afb6聨0819f05c4eef4c71ace90d822a990e87, ModelName=C0805_L2.0-W1.3-H1.3, ModelTransform=78.74,51.181,0,0,0,0,0,0.0005,0, Source=P1.SCHLIB, Supplier Footprint=0805, Symbol=0805CG160J500NT
C9 C10 C20 C21 C22 C24 C25 C26 C27 C28 C29: library part CMP-015-000003-2, "Capacitance:100nF Tolerance:±5% Tolerance:±5% Voltage Rating:50V Temperature Coefficient:X7R", JLCPCB Part Class="Extended Part", LCSC Part Name="100nF ±5% 50V", Manufacturer=YAGEO(国巨), Manufacturer Part Number=CC0805JRX7R9BB104, Supplier Part Number=C111492, Temperature Coefficient=X7R, Tolerance=5%, Voltage Rating=50V, AddInBom=yes, ConvertToPcb=yes, Datasheet=https://item.szlcsc.com/datasheet/CC0805JRX7R9BB104/112720.html, Design Item ID=CC0805JRX7R9BB104, Device=CC0805JRX7R9BB104, FootprintName=C0805, ModelId=8c88e81f49c6409b980720ec8953afb6聨0819f05c4eef4c71ace90d822a990e87, ModelName=C0805_L2.0-W1.3-H1.3, ModelTransform=78.74,51.181,0,0,0,0,0,0.0005,0, Source=P1.SCHLIB, Supplier Footprint=0805, Symbol=CC0805JRX7R9BB104
C13 C31: library part CMP-015-000008-1, "Capacitance:62pF Tolerance:±5% Tolerance:±5% Voltage Rating:50V Temperature Coefficient:C0G", JLCPCB Part Class="Extended Part", LCSC Part Name="62pF ±5% 50V", Manufacturer=FH(风华), Temperature Coefficient=C0G, Tolerance=5%, Voltage Rating=50V, AddInBom=yes, ConvertToPcb=yes, Datasheet=https://item.szlcsc.com/datasheet/0603CG620J500NT/61784.html, Design Item ID=0603CG620J500NT, Device=0603CG620J500NT, FootprintName=C0603, ManufacturerPart=0603CG620J500NT, ModelId=624118aa3cc7497086c383c2d72e0852ÂŽ0819f05c4eef4c71ace90d822a990e87, ModelName=C0603_L1.6-W0.8-H0.8, ModelTransform=62.992,31.496,0,0,0,0,0,0,0, Source=P1.SCHLIB, Supplier Footprint=0603, SupplierPart=C60732, Symbol=0603CG620J500NT
C19 C23: library part CMP-015-000005-1, "Capacitance:22uF Tolerance:±10% Tolerance:±10% Voltage Rating:10V Temperature Coefficient:X5R", JLCPCB Part Class="Extended Part", LCSC Part Name="22uF ±10% 10V", Manufacturer=CCTC(三环), Supplier Part Number=C380336, Temperature Coefficient=X5R, Tolerance=10%, Voltage Rating=10V, AddInBom=yes, ConvertToPcb=yes, Datasheet=https://item.szlcsc.com/datasheet/TCC0805X5R226K100FT/352741.html, Design Item ID=TCC0805X5R226K100FT, Device=TCC0805X5R226K100FT, FootprintName=C0805, Manufacturer Part Number=TCC0805X5R226K100FT, ModelId=8c88e81f49c6409b980720ec8953afb6聨0819f05c4eef4c71ace90d822a990e87, ModelName=C0805_L2.0-W1.3-H1.3, ModelTransform=78.74,51.181,0,0,0,0,0,0.0005,0, Source=P1.SCHLIB, Supplier Footprint=0805, Symbol=TCC0805X5R226K100FT
D1 D5: library part CMP-08607-000120-1, "TVS DIODE 40VWM 64.5VC DO214AA", Breakdown Voltage=44.4V, Case/Package=DO-214AA, Clamping Voltage=64.5V, Leakage Current=1uA, Max Breakdown Voltage=49.1V, Max Operating Temperature=150°C, Max Power Dissipation=5W, Max Surge Current=9.3A, Min Operating Temperature=-55°C, Operating Supply Voltage=40V, Package Quantity=3000, Peak Pulse Power=600W, Power Line Protection=No, Resistor Type=Zener, Test Current=1mA, Clamping Voltage-Max=64.5V, Diode Type=ZENER, Direction=Unidirectional, Element Configuration=Single, Height=2.237mm, Lead Free="Lead Free", Length=4.57mm, Max Reverse Leakage Current=1uA, Min Breakdown Voltage=44.4V, Mount="Surface Mount", Number of Channels=1, Number of Elements=1, Number of Pins=2, Number of Unidirectional Channels=1, Packaging="Tape and Reel", Peak Pulse Current=9.3A, Polarity=Unidirectional, Power Dissipation=600W, Reverse Breakdown Voltage=44.4V, Reverse Standoff Voltage=40V, RoHS Compliant=Yes, Series=SMBJ, Termination=SMD/SMT, Voltage Rating (DC)=40V, Width=3.94mm
D2 D4: library part CMP-12828-000012-1, "TVS DIODE 5V 9.2V SMB", Breakdown Voltage=6.4V, Clamping Voltage=9.2V, Manufacturer="Diodes Inc", Max Junction Temp=+150°C, Package=SMB-CA, Peak Pulse Current=65.2A, Peak Pulse Power=600W, Reverse Standoff Voltage=5V, Temperature="-55°C to +150°C", Temperature Range Low=-55°C, Automotive=No, Category=Diode, ComponentLink2Description=Datasheet, ComponentLink2URL=https://www.diodes.com/assets/Datasheets/ds19002.pdf, Device Class L1="Circuit Protection", Device Class L2="TVS Diodes", Device Class L3=unset, Digikey Description="TVS DIODE 5V 9.2V SMB", Direction=Bidirectional, Footprint Url=https://www.diodes.com/assets/Package-Files/SMB.pdf, Height=2.5mm, Lead Free=Yes, Manufacturer Part Number=SMBJ5.0CA-13-F, Mouser Description="TVS Diodes - Transient Voltage Suppressors 600W 5.0V", Number of Channels=1, Octopart=https://octopart.com/smbj5.0ca-13-f-diodes+inc.-13025192, RoHS=TRUE, Standoff Height=0.05mm, Temperature Range High=+150°C
D3 D6 D9: library part CMP-2000-04932-2, "Fast Switching Diode, 100 V, 0.15 A, -65 to 150 degC, 2-Pin?SOD123, RoHS, Tape and Reel", If - Forward Current=0.15A, Ir - Reverse Current=1uA, Manufacturer="Diodes Inc", Max Surge Current=2A, Maximum Operating Temperature=+150C, Minimum Operating Temperature=-65C, Operating Temperature Range=-65Cto+150C, Package / Case=SOD-123, Package Reference=SOD123-2, Peak Reverse Voltage=100V, Vf - Forward Voltage=1.25V, Configuration=Single, Datasheet URL=http://www.farnell.com/datasheets/1915529.pdf, Datasheet Version="Rev. 24-2, 10/2013", Factory Pack Quantity=3000, Height=1.25mm, Length=2.85mm, Manufacturer URL=http://www.diodes.com/, Mounting Style=SMD/SMT, Package URL=http://www.diodes.com/datasheets/ds18004.pdf, Packaging=Reel, Product=SwitchingDiodes, Product Category=Diodes-GeneralPurpose,Power,Switching, Recovery Time=4ns, RoHS=True, Series=1N4148, Type=SwitchingDiode, Unit Weight=0.000353oz, Width=1.7mm
D7 D8: library part CMP-07163-000036-1, "DIODE ARRAY 100V 215MA SOT23-3", Capacitance=1.5pF, Case/Package=SOT-23, Current Rating=200mA, Forward Current=150mA, Forward Voltage=1.25V, Max Forward Surge Current (Ifsm)=500mA, Max Operating Temperature=150°C, Max Repetitive Reverse Voltage (Vrrm)=70V, Min Operating Temperature=-65°C, Peak Non-Repetitive Surge Current=2A, Peak Reverse Current=2.5uA, Height=0.94mm, Lead Free="Lead Free", Length=2.9mm, Mount="Surface Mount", Number of Pins=3, Packaging="Tape and Reel", REACH SVHC="No SVHC", Reverse Recovery Time=6ns, Voltage Rating (DC)=70V, Width=1.3mm
J1: library part CMP-012-000002-1, "Pin Structure:2x10P Pitch:2.54mm Row Spacing:2.54mm Circluar Pins/Square Pins:Pin Header Mounting Type:Through Hole Number of Rows:2 Number of Pins:20P Current Rating:2.5A Length of Mating Pin:6mm Insulation Height:2.54mm Length of End Connection Pin:3mm", Current Rating=2.5A, JLCPCB Part Class="Extended Part", LCSC Part Name="2x10P 间距:2.54mm 方针 直插", Manufacturer=ZHOURI(洲日), Operating Temperature=-40℃~+105℃, Supplier Part Number=C5116480, AddInBom=yes, Circluar Pins/Square Pins="Pin Header", Contact Material=Brass, Contact Plating=Gold, ConvertToPcb=yes, Datasheet=https://item.szlcsc.com/datasheet/2.54-2*10/5692723.html, Design Item ID=2.54-2*10, Device=2.54-2*10, FootprintName=HDR-TH_20P-P2.54-V-M-R2-C10-S2.54, Insulation Height=2.54mm, Length of End Connection Pin=3mm, Length of Mating Pin=6mm, Manufacturer Part Number=2.54-2*10, ModelId=7b46918fe38e4962af531f5fab9490b0聨0819f05c4eef4c71ace90d822a990e87, ModelName=HDR-TH_20P-P2.54-V-M-R2-C10-S2.54-1, ModelTransform=1000.3917,199.9996,0,0,0,0,0,0,-118.11, Mounting Type="Through Hole", Number of Pins=20P, Number of Rows=2, Pin Structure=2x10P, Pitch=2.54mm, Row Spacing=2.54mm, Source=P1.SCHLIB, Supplier Footprint=插件,P=2.54mm, Symbol=2.54-2*10
J2: library part CMP-012-000001-1, "Pin Structure:2x8P Pitch:2.54mm Row Spacing:2.54mm Circluar Pins/Square Pins:Pin Header Mounting Type:Through Hole Number of Rows:2 Number of Pins:16P Current Rating:3A Voltage Rating (Max):- Length of Mating Pin:5.9mm Insulation Height:2.54mm Length of E", Color=Black, Current Rating=3A, JLCPCB Part Class="Extended Part", LCSC Part Name="2x8P 间距:2.54mm 方针 直插", Manufacturer=BOOMELE(博穆精密), Manufacturer Part Number=2.54-2*8P针, Operating Temperature=-55℃~+105℃, Supplier Part Number=C68234, Voltage Rating (Max)=-, AddInBom=yes, Circluar Pins/Square Pins="Pin Header", Contact Material=Brass, Contact Plating=Gold, ConvertToPcb=yes, Datasheet=https://item.szlcsc.com/datasheet/2.54-2*8P%25E9%2592%2588/69336.html, Design Item ID=2.54-2*8P针_C68234, Device=2.54-2*8P针_C68234, FootprintName=HDR-TH_16P-P2.54-V-M-R2-C8-S2.54, Insulation Height=2.54mm, Length of End Connection Pin=3mm, Length of Mating Pin=5.9mm, ModelId=e9bbe0154d6648aeb599214ae56f6999聨0819f05c4eef4c71ace90d822a990e87, ModelName=HDR2.54-M-LI-2X8P, ModelTransform=799.99844,200,0,0,0,0,0,0,-118.11, Mounting Type="Through Hole", Number of Pins=16P, Number of Rows=2, Pin Structure=2x8P, Pitch=2.54mm, Row Spacing=2.54mm, Source=P1.SCHLIB, Supplier Footprint=插件,P=2.54mm, Symbol=Header-Male-2.54_2x8
J3: library part CMP-012-000006-1, "2.54mm pitch, 2 rows, 2*17, 34 pins total"
J4: library part CMP-012-000005-1, "Pin Structure:2x15P Pitch:2.54mm Row Spacing:2.54mm Circluar Pins/Square Pins:Pin Header Mounting Type:Through Hole Number of Rows:2 Number of Pins:30P Current Rating:2.5A Length of Mating Pin:6mm Insulation Height:2.54mm Length of End Connection Pin:3mm", Current Rating=2.5A, JLCPCB Part Class="Extended Part", LCSC Part Name="2x15P 间距:2.54mm 方针 直插", Manufacturer=ZHOURI(洲日), Operating Temperature=-40℃~+105℃, Supplier Part Number=C5224013, AddInBom=yes, Circluar Pins/Square Pins="Pin Header", Contact Material=Brass, Contact Plating=Gold, ConvertToPcb=yes, Datasheet=https://item.szlcsc.com/datasheet/PZ2.54-2*15/5925192.html, Design Item ID=PZ2.54-2*15, Device=PZ2.54-2*15, FootprintName=HDR-TH_30P-P2.54-V-M-R2-C15-S2.54-2, Insulation Height=2.54mm, Length of End Connection Pin=3mm, Length of Mating Pin=6mm, Manufacturer Part Number=PZ2.54-2*15, ModelId=20e3c55689c04fa0b6843741cd965711聨0819f05c4eef4c71ace90d822a990e87, ModelName=HDR-TH_30P-P2.54-V-M-R2-C15-S2.54-2, ModelTransform=1500.036,196.85,0,0,0,0,0,0,-118.11, Mounting Type="Through Hole", Number of Pins=30P, Number of Rows=2, Pin Structure=2x15P, Pitch=2.54mm, Row Spacing=2.54mm, Source=P1.SCHLIB, Supplier Footprint=插件,P=2.54mm, Symbol=PZ2.54-2*15
Q1 Q2 Q3: library part CMP-1058-00781-1, "Small Signal MOSFET, 60 V, 115 mA, N-Channel, 3-Pin SOT-23, Pb-Free, Tape and Reel", Manufacturer="On Semiconductor", Package Type=SOT-23-3, Channel Polarity="N Channel", ComponentLink1Description="Manufacturer URL", ComponentLink1URL=http://www.onsemi.com/, ComponentLink2Description=Datasheet, ComponentLink2URL=http://www.onsemi.com/pub_link/Collateral/2N7002L-D.PDF, ComponentLink3Description="Package Specification", ComponentLink3URL=http://www.onsemi.cn/pub_link/Collateral/318-08.PDF, Configuration=Single, DatasheetVersion="Rev. 7", ID Max (A)=0.115, Mounting Technology="Surface Mount", PackageDescription="3-Pin Small Outline Transistor, Body 2.92 x 1.3 mm, Pitch 0.95 mm", PackageReference=SOT-23-3-318-08, PackageVersion="Rev. AP, 11/2009", Packing="Tape and Reel", PartNumber=2N7002LT1G, RoHS=Pb-Free, V(BR)DSS Min (V)=60, VGS Max (V)=20, VGS(th) Max (V)=2.5
R1 R7: library part CMP-016-000007-1, "Type:Thick Film Resistor Resistance:1MΩ Tolerance:±1% Tolerance:±1% Power(Watts):125mW Voltage-Supply(Max):150V Temperature Coefficient:±100ppm/℃ Temperature Coefficient:±100ppm/℃ Operating Temperature:-55℃~+155℃ Operating Temperature:-55℃~+155℃", JLCPCB Part Class="Extended Part", LCSC Part Name="1MΩ ±1% 125mW 厚膜电阻", Manufacturer=FOJAN(富捷), Manufacturer Part Number=FRC0805F1004TS, Operating Temperature=-55℃~+155℃, Power(Watts)=125mW, Supplier Part Number=C2933280, Temperature Coefficient=±100ppm/℃, Tolerance=1%, Voltage-Supply(Max)=150V, AddInBom=yes, ConvertToPcb=yes, Design Item ID=FRC0805F1004TS, Device=FRC0805F1004TS, FootprintName=R0805, ModelId=b83c7c5430874b8eb2319a65d9433429聨0819f05c4eef4c71ace90d822a990e87, ModelName=R0805_L2.0-W1.3-H0.6, ModelTransform=78.74,51.181,0,0,0,0,0,-0.0005,0, Source=P1.SCHLIB, Supplier Footprint=0805, Symbol=FRC0805F1004TS, Type="Thick Film Resistor"
R2 R9 R32 R50: library part CMP-016-000006-1, "Type:Thick Film Resistor Resistance:100Ω Tolerance:±1% Tolerance:±1% Power(Watts):125mW Voltage-Supply(Max):150V Temperature Coefficient:±100ppm/℃ Temperature Coefficient:±100ppm/℃ Operating Temperature:-55℃~+155℃ Operating Temperature:-55℃~+155℃", JLCPCB Part Class="Extended Part", LCSC Part Name="100Ω ±1% 125mW 厚膜电阻", Manufacturer=FOJAN(富捷), Manufacturer Part Number=FRC0805F1000TS, Operating Temperature=-55℃~+155℃, Power(Watts)=125mW, Supplier Part Number=C2907218, Temperature Coefficient=±100ppm/℃, Tolerance=1%, Voltage-Supply(Max)=150V, AddInBom=yes, ConvertToPcb=yes, Datasheet=https://item.szlcsc.com/datasheet/FRC0805F1000TS/3180731.html, Design Item ID=FRC0805F1000TS, Device=FRC0805F1000TS, FootprintName=R0805, ModelId=b83c7c5430874b8eb2319a65d9433429聨0819f05c4eef4c71ace90d822a990e87, ModelName=R0805_L2.0-W1.3-H0.6, ModelTransform=78.74,51.181,0,0,0,0,0,-0.0005,0, Source=P1.SCHLIB, Supplier Footprint=0805, Symbol=FRC0805F1000TS, Type="Thick Film Resistor"
R3 R11: library part CMP-016-000015-1, "Type:Thick Film Resistor Resistance:910kΩ Tolerance:±1% Tolerance:±1% Power(Watts):125mW Voltage-Supply(Max):150V Temperature Coefficient:±100ppm/℃ Temperature Coefficient:±100ppm/℃ Operating Temperature:-55℃~+155℃ Operating Temperature:-55℃~+155℃", JLCPCB Part Class="Extended Part", LCSC Part Name="910kΩ ±1% 125mW 厚膜电阻", Manufacturer=FOJAN(富捷), Manufacturer Part Number=FRC0805F9103TS, Operating Temperature=-55℃~+155℃, Power(Watts)=125mW, Supplier Part Number=C2999461, Temperature Coefficient=±100ppm/℃, Tolerance=1%, Voltage-Supply(Max)=150V, AddInBom=yes, ConvertToPcb=yes, Design Item ID=FRC0805F9103TS, Device=FRC0805F9103TS, FootprintName=R0805, ModelId=b83c7c5430874b8eb2319a65d9433429聨0819f05c4eef4c71ace90d822a990e87, ModelName=R0805_L2.0-W1.3-H0.6, ModelTransform=78.74,51.181,0,0,0,0,0,-0.0005,0, Source=P1.SCHLIB, Supplier Footprint=0805, Symbol=FRC0805F9103TS, Type="Thick Film Resistor"
R4 R10: library part CMP-016-000003-1, "Type:Thick Film Resistor Resistance:100kΩ Tolerance:±1% Tolerance:±1% Power(Watts):125mW Voltage-Supply(Max):150V Temperature Coefficient:±100ppm/℃ Temperature Coefficient:±100ppm/℃ Operating Temperature:-55℃~+155℃ Operating Temperature:-55℃~+155℃", JLCPCB Part Class="Basic Part", LCSC Part Name="100kΩ ±1% 125mW 厚膜电阻", Manufacturer=UNI-ROYAL(厚声), Manufacturer Part Number=0805W8F1003T5E, Operating Temperature=-55℃~+155℃, Power(Watts)=125mW, Supplier Part Number=C149504, Temperature Coefficient=±100ppm/℃, Tolerance=1%, Voltage-Supply(Max)=150V, AddInBom=yes, ConvertToPcb=yes, Datasheet=https://item.szlcsc.com/datasheet/0805W8F1003T5E/160838.html, Design Item ID=0805W8F1003T5E, Device=0805W8F1003T5E, FootprintName=R0805, ModelId=b83c7c5430874b8eb2319a65d9433429聨0819f05c4eef4c71ace90d822a990e87, ModelName=R0805_L2.0-W1.3-H0.6, ModelTransform=78.74,51.181,0,0,0,0,0,-0.0005,0, Source=P1.SCHLIB, Supplier Footprint=0805, Symbol=0805W8F1003T5E_C149504, Type="Thick Film Resistor"
R5 R8 R42 R44 R46 R47 R49: library part CMP-016-000001-1, "Type:Thick Film Resistors Resistance:1kΩ Tolerance:±1% Tolerance:±1% Power(Watts): Overload Voltage (Max): Temperature Coefficient:±100ppm/℃ Temperature Coefficient:±100ppm/℃ Operating Temperature Range:-55℃~+155℃ Operating Temperature Range:-55℃~+155℃", JLCPCB Part Class="Basic Part", LCSC Part Name="1kΩ ±1% 125mW 厚膜电阻", Manufacturer=UNI-ROYAL(厚声), Manufacturer Part Number=0805W8F1001T5E, Operating Temperature Range=-55℃~+155℃, Supplier Part Number=C17513, Temperature Coefficient=±100ppm/℃, Tolerance=1%, AddInBom=yes, ConvertToPcb=yes, Datasheet=https://atta.szlcsc.com/upload/public/pdf/source/20200306/C422600_1E6D84923E4A46A82E41ADD87F860B5C.pdf, Design Item ID=0805W8F1001T5E, Device=0805W8F1001T5E, FootprintName=R0805, ModelId=b83c7c5430874b8eb2319a65d9433429聨0819f05c4eef4c71ace90d822a990e87, ModelName=R0805_L2.0-W1.3-H0.6, ModelTransform=78.74,51.181,0,0,0,0,0,-0.0005,0, Source=P1.SCHLIB, Supplier Footprint=0805, Symbol=0805W8F1001T5E, Type="Thick Film Resistors"
R6 R20: library part CMP-016-000009-1, "Type:Thick Film Resistor Resistance:1.5kΩ Tolerance:±1% Tolerance:±1% Power(Watts):125mW Voltage-Supply(Max):150V Temperature Coefficient:±100ppm/℃ Temperature Coefficient:±100ppm/℃ Operating Temperature:-55℃~+155℃ Operating Temperature:-55℃~+155℃", JLCPCB Part Class="Extended Part", LCSC Part Name="1.5kΩ ±1% 125mW 厚膜电阻", Manufacturer=FOJAN(富捷), Manufacturer Part Number=FRC0805F1501TS, Operating Temperature=-55℃~+155℃, Power(Watts)=125mW, Supplier Part Number=C2907216, Temperature Coefficient=±100ppm/℃, Tolerance=1%, Voltage-Supply(Max)=150V, AddInBom=yes, ConvertToPcb=yes, Design Item ID=FRC0805F1501TS, Device=FRC0805F1501TS, FootprintName=R0805, ModelId=b83c7c5430874b8eb2319a65d9433429聨0819f05c4eef4c71ace90d822a990e87, ModelName=R0805_L2.0-W1.3-H0.6, ModelTransform=78.74,51.181,0,0,0,0,0,-0.0005,0, Source=P1.SCHLIB, Supplier Footprint=0805, Symbol=FRC0805F1501TS, Type="Thick Film Resistor"
R12 R21: library part CMP-016-000012-1, "Type:Thick Film Resistor Resistance:3.57kΩ Tolerance:±1% Tolerance:±1% Power(Watts):125mW Voltage-Supply(Max):150V Temperature Coefficient:±100ppm/℃ Temperature Coefficient:±100ppm/℃ Operating Temperature:-55℃~+155℃ Operating Temperature:-55℃~+155℃", JLCPCB Part Class="Extended Part", LCSC Part Name="3.57kΩ ±1% 125mW 厚膜电阻", Manufacturer=FOJAN(富捷), Manufacturer Part Number=FRC0805F3571TS, Operating Temperature=-55℃~+155℃, Power(Watts)=125mW, Supplier Part Number=C2933425, Temperature Coefficient=±100ppm/℃, Tolerance=1%, Voltage-Supply(Max)=150V, AddInBom=yes, ConvertToPcb=yes, Datasheet=https://item.szlcsc.com/datasheet/FRC0805F3571TS/3279527.html, Design Item ID=FRC0805F3571TS, Device=FRC0805F3571TS, FootprintName=R0805, ModelId=b83c7c5430874b8eb2319a65d9433429聨0819f05c4eef4c71ace90d822a990e87, ModelName=R0805_L2.0-W1.3-H0.6, ModelTransform=78.74,51.181,0,0,0,0,0,-0.0005,0, Source=P1.SCHLIB, Supplier Footprint=0805, Symbol=FRC0805F3571TS, Type="Thick Film Resistor"
R13 R22: library part CMP-016-000014-1, "Type:Thick Film Resistor Resistance:6.98kΩ Tolerance:±1% Tolerance:±1% Power(Watts):125mW Voltage-Supply(Max):150V Temperature Coefficient:±100ppm/℃ Temperature Coefficient:±100ppm/℃ Operating Temperature:-55℃~+155℃ Operating Temperature:-55℃~+155℃", JLCPCB Part Class="Extended Part", LCSC Part Name="6.98kΩ ±1% 125mW 厚膜电阻", Manufacturer=FOJAN(富捷), Manufacturer Part Number=FRC0805F6981TS, Operating Temperature=-55℃~+155℃, Power(Watts)=125mW, Supplier Part Number=C2933489, Temperature Coefficient=±100ppm/℃, Tolerance=1%, Voltage-Supply(Max)=150V, AddInBom=yes, ConvertToPcb=yes, Datasheet=https://item.szlcsc.com/datasheet/FRC0805F6981TS/3279591.html, Design Item ID=FRC0805F6981TS, Device=FRC0805F6981TS, FootprintName=R0805, ModelId=b83c7c5430874b8eb2319a65d9433429聨0819f05c4eef4c71ace90d822a990e87, ModelName=R0805_L2.0-W1.3-H0.6, ModelTransform=78.74,51.181,0,0,0,0,0,-0.0005,0, Source=P1.SCHLIB, Supplier Footprint=0805, Symbol=FRC0805F6981TS, Type="Thick Film Resistor"
R14 R23: library part CMP-016-000017-1, "Type:Thin Film Resistor Resistance:10.1kΩ Tolerance:±0.1% Tolerance:±0.1% Power(Watts):125mW Temperature Coefficient:±25ppm/℃ Temperature Coefficient:±25ppm/℃ Operating Temperature:-55℃~+155℃ Operating Temperature:-55℃~+155℃", JLCPCB Part Class="Extended Part", LCSC Part Name="薄膜电阻 10.1kΩ ±0.1% 125mW", Manufacturer=YAGEO(国巨), Operating Temperature=-55℃~+155℃, Power(Watts)=125mW, Supplier Part Number=C865133, Temperature Coefficient=±25ppm/℃, Tolerance=0.1%, AddInBom=yes, ConvertToPcb=yes, Datasheet=https://item.szlcsc.com/datasheet/RT0805BRD0710K1L/925214.html, Design Item ID=RT0805BRD0710K1L, Device=RT0805BRD0710K1L, FootprintName=R0805, Manufacturer Part Number=RT0805BRD0710K1L, ModelId=b83c7c5430874b8eb2319a65d9433429聨0819f05c4eef4c71ace90d822a990e87, ModelName=R0805_L2.0-W1.3-H0.6, ModelTransform=78.74,51.181,0,0,0,0,0,-0.0005,0, Source=P1.SCHLIB, Supplier Footprint=0805, Symbol=RT0805BRD0710K1L, Type="Thin Film Resistor"
R15 R24: library part CMP-016-000004-1, "Type:Thick Film Resistor Resistance:18.7kΩ Tolerance:±1% Tolerance:±1% Power(Watts):125mW Voltage-Supply(Max):150V Temperature Coefficient:±100ppm/℃ Temperature Coefficient:±100ppm/℃ Operating Temperature:-55℃~+155℃ Operating Temperature:-55℃~+155℃", JLCPCB Part Class="Extended Part", LCSC Part Name="18.7kΩ ±1% 125mW 厚膜电阻", Manufacturer=UNI-ROYAL(厚声), Manufacturer Part Number=0805W8F1872T5E, Operating Temperature=-55℃~+155℃, Power(Watts)=125mW, Supplier Part Number=C17499, Temperature Coefficient=±100ppm/℃, Tolerance=1%, Voltage-Supply(Max)=150V, AddInBom=yes, ConvertToPcb=yes, Datasheet=https://item.szlcsc.com/datasheet/0805W8F1872T5E/18187.html, Design Item ID=0805W8F1872T5E, Device=0805W8F1872T5E, FootprintName=R0805, ModelId=b83c7c5430874b8eb2319a65d9433429聨0819f05c4eef4c71ace90d822a990e87, ModelName=R0805_L2.0-W1.3-H0.6, ModelTransform=78.74,51.181,0,0,0,0,0,-0.0005,0, Source=P1.SCHLIB, Supplier Footprint=0805, Symbol=0805W8F1872T5E, Type="Thick Film Resistor"
R16 R25: library part CMP-016-000016-1, "Type:Thick Film Resistor Resistance:7.68kΩ Tolerance:±1% Tolerance:±1% Power(Watts):125mW Voltage-Supply(Max):150V Temperature Coefficient:±100ppm/℃ Temperature Coefficient:±100ppm/℃ Operating Temperature:-55℃~+155℃ Operating Temperature:-55℃~+155℃", JLCPCB Part Class="Extended Part", LCSC Part Name="厚膜电阻 7.68kΩ ±1% 125mW", Manufacturer=YAGEO(国巨), Manufacturer Part Number=RC0805FR-077K68L, Operating Temperature=-55℃~+155℃, Power(Watts)=125mW, Supplier Part Number=C273951, Temperature Coefficient=±100ppm/℃, Tolerance=1%, Voltage-Supply(Max)=150V, AddInBom=yes, ConvertToPcb=yes, Datasheet=https://item.szlcsc.com/datasheet/RC0805FR-077K68L/262366.html, Design Item ID=RC0805FR-077K68L, Device=RC0805FR-077K68L, FootprintName=R0805, ModelId=b83c7c5430874b8eb2319a65d9433429聨0819f05c4eef4c71ace90d822a990e87, ModelName=R0805_L2.0-W1.3-H0.6, ModelTransform=78.74,51.181,0,0,0,0,0,-0.0005,0, Source=P1.SCHLIB, Supplier Footprint=0805, Symbol=RC0805FR-077K68L, Type="Thick Film Resistor"